# Allegro board 600-90523-01_CYW9BTWCDEVAL1_REV2.0.brd
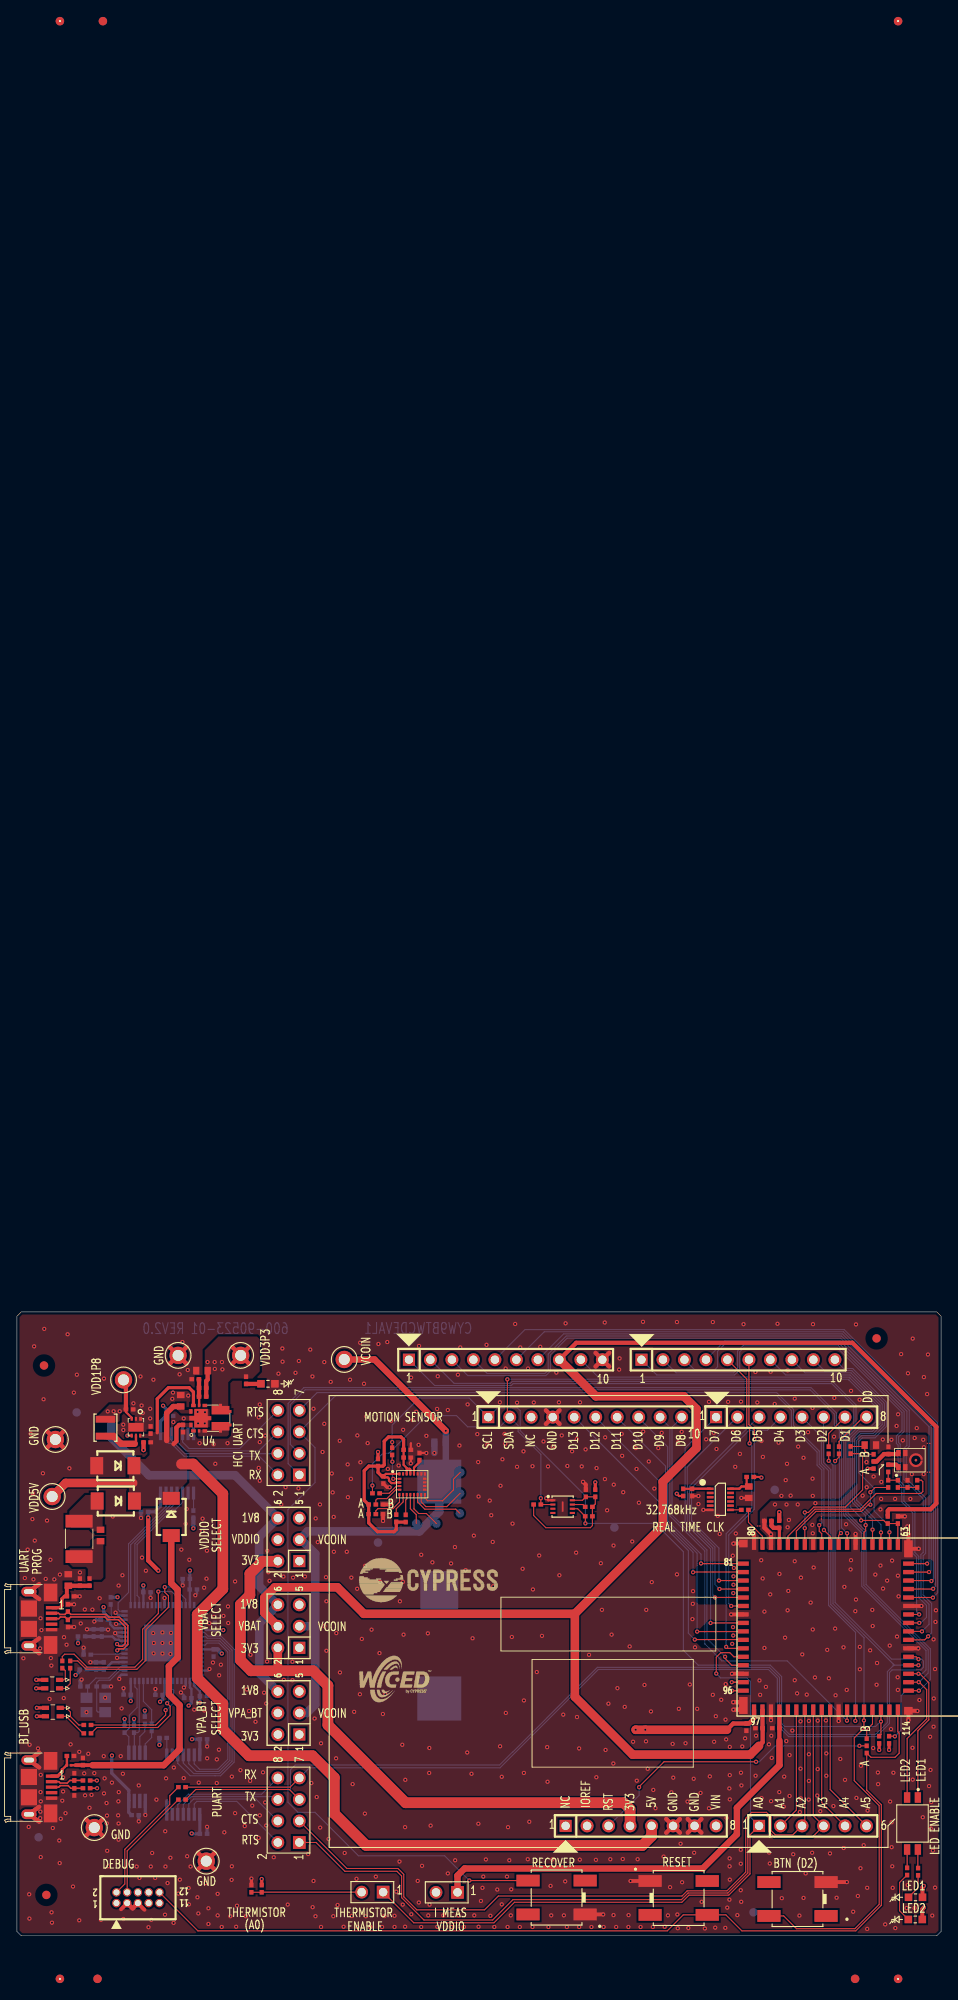
[diagram p0: board, top side]
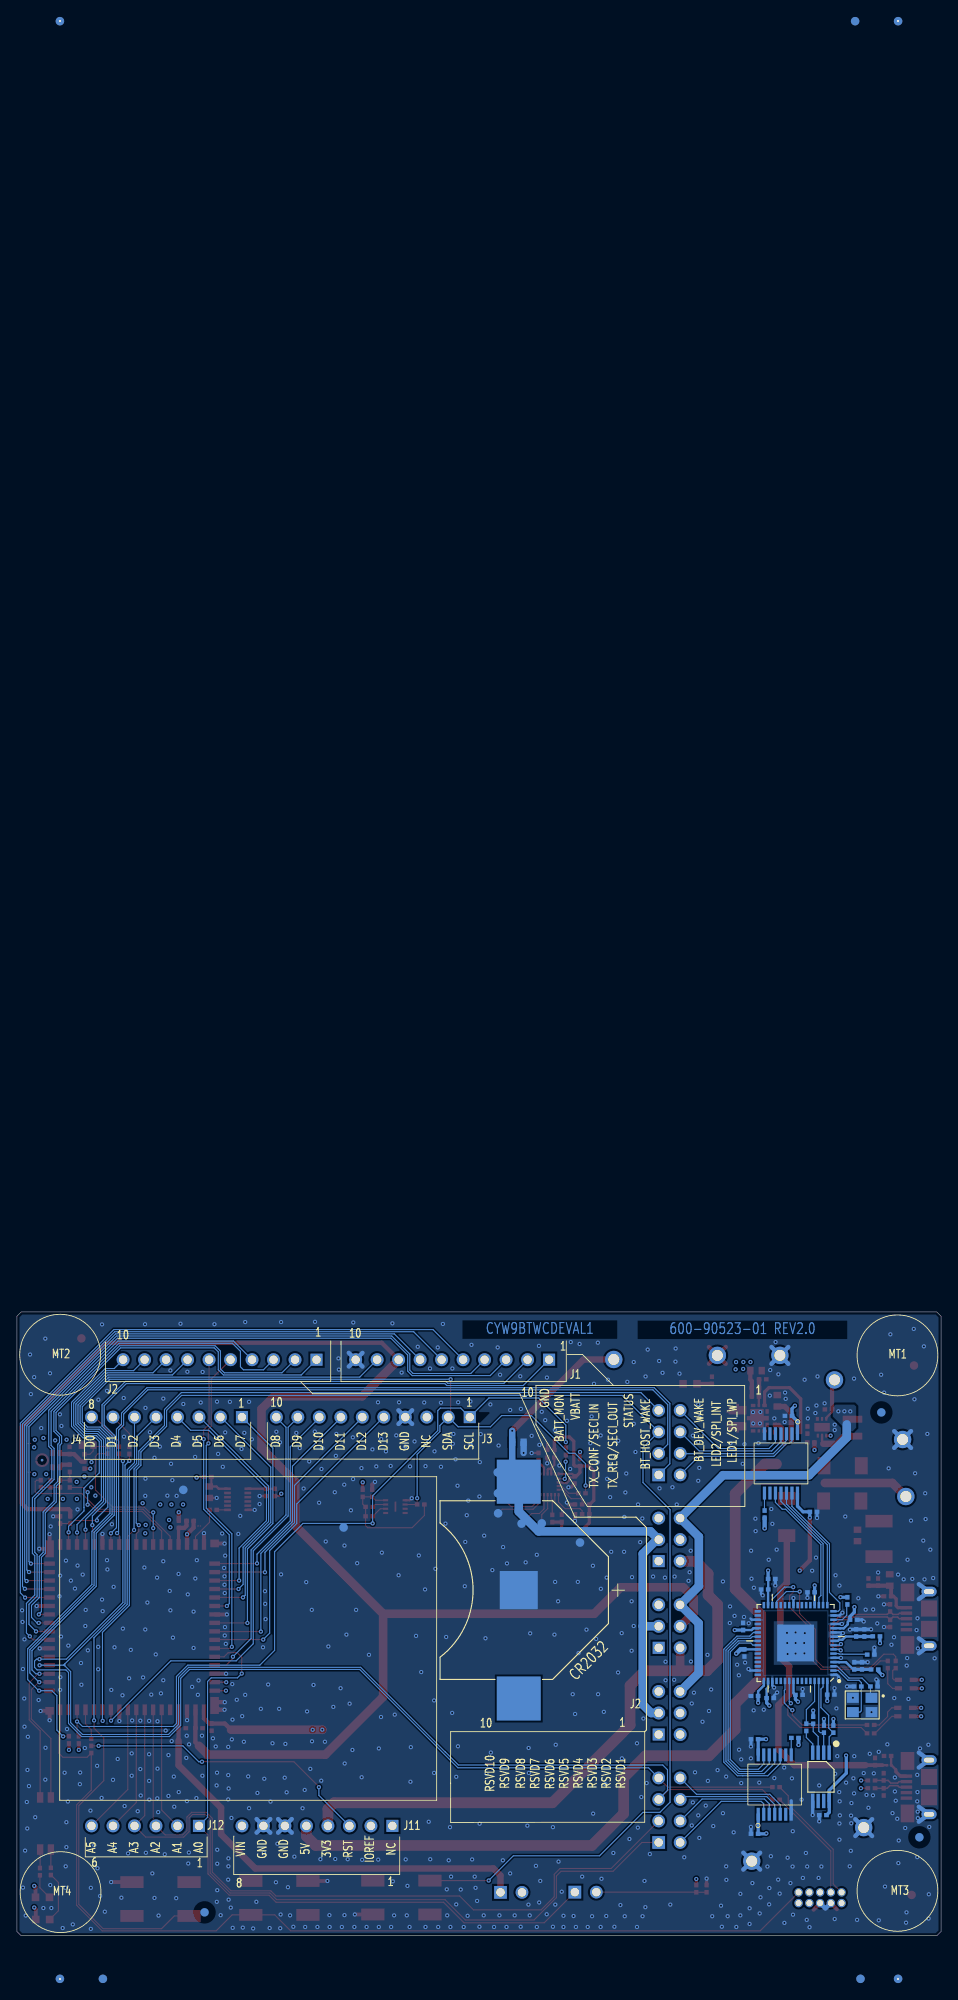
[diagram p1: board, bottom side, seen from below]

Outline 109.22 x 73.66 mm; copper layers: TOP, L02_GND, L03_PWR, BOTTOM. Coordinates in mm from the lower left corner of the outline.
Outline path: 0,73.15 0,0.51 0.51,0 108.71,0 109.22,0.51 109.22,73.15 108.71,73.66 0.51,73.66 0,73.15

## Design rules (mm)
net group DIFFPAIR0: nets N16980600 N16980623
net group DIFFPAIR1: nets BT_USB_DM BT_USB_DP
net group PWR: nets 1V8_FTDI VDDIO
net group USB: nets USB_DM USB_DP

## Placement (name value [footprint] x y rotation side)
C1  0.1uF  [CAPC1005_IS0402Q]  89.69 24.51 180 top
C2  0.1uF  [CAPC1005_IS0402Q]  88.75 49 180 top
C3  0.1uF  [CAPC1005_IS0402Q]  87.71 24.51 180 top
C4  10uF  [CAPC1608_IS0603Q]  86.49 52.37 270 top
C5  4.7uF  [CAPC1608_IS0603Q]  100.86 57.94 0 top
C6  0.1uF  [CAPC1005_IS0402Q]  103 57.3 90 top
C7  0.1uF  [CAPC1005_IS0402Q]  102.97 55.19 90 top
C8  0.1uF  [CAPC1005_IS0402Q]  43.31 53.82 90 top
C9  10uF  [CAPC1005_IS0402Q]  46.13 57.38 0 top
C10  0.1uF  [CAPC1005_IS0402Q]  46.13 56.46 0 top
C11  0.1uF  [CAPC1005_IS0402Q]  67.23 52.25 90 top
C12  0.01uF  [CAPC1005_IS0402Q]  47.57 56.59 270 top
C13  4.7uF  [CAPC1608_IS0603Q]  50.01 58.27 180 bottom
C15  0.33uF  [CAPC1005_IS0402Q]  21.95 63.65 180 top
C16  10uF  [CAPC1608_IS0603Q]  21.87 66.73 180 top
C17  10uF  [CAPC1608_IS0603Q]  19.35 63.17 90 top
C18  1uF  [CAPC1005_IS0402Q]  19.63 59.89 270 top
C19  10uF  [CAPC1005_IS0402Q]  15.8 59.72 90 top
C20  10uF  [CAPC1005_IS0402Q]  13.31 62.15 0 top
C21  0.1uF  [CAPC1005_IS0402Q]  23.39 36.53 270 bottom
C22  0.1uF  [CAPC1005_IS0402Q]  10.34 37.31 0 bottom
C23  0.1uF  [CAPC1005_IS0402Q]  13.03 28.47 0 bottom
C24  0.1uF  [CAPC1005_IS0402Q]  18.03 61.39 180 bottom
C25  0.1uF  [CAPC1005_IS0402Q]  15.09 50.06 0 bottom
C28  0.1uF  [CAPC1005_IS0402Q]  79.81 52.35 270 top
C29  0.1uF  [CAPC1005_IS0402Q]  16.79 28.45 0 bottom
C30  0.1uF  [CAPC1005_IS0402Q]  15.37 40.56 180 bottom
C31  0.1uF  [CAPC1005_IS0402Q]  20.85 40.89 180 bottom
C32  0.1uF  [CAPC1005_IS0402Q]  23.24 33.4 90 bottom
C33  4.7uF  [CAPC1005_IS0402Q]  20.02 42.14 180 bottom
C34  0.1uF  [CAPC1005_IS0402Q]  10.26 31.88 270 bottom
C35  4.7uF  [CAPC1005_IS0402Q]  9.35 31.88 90 bottom
C36  0.1uF  [CAPC1005_IS0402Q]  10.03 35.76 270 bottom
C37  4.7uF  [CAPC1005_IS0402Q]  9.07 35.76 90 bottom
C38  0.1uF  [CAPC1005_IS0402Q]  6.32 40.08 180 top
C39  4.7uF  [CAPC1608_IS0603Q]  6.07 42.01 90 top
C40  3.3uF  [CAPC1005_IS0402Q]  22.05 28.32 0 bottom
C41  0.1uF  [CAPC1005_IS0402Q]  20.19 28.07 0 bottom
C42  0.1uF  [CAPC1005_IS0402Q]  22.05 12.04 180 bottom
C43  0.1uF  [CAPC1005_IS0402Q]  22.05 23.22 180 bottom
C44  9pF  [CAPC1005_IS0402Q]  7.92 29.44 180 bottom
C45  9pF  [CAPC1005_IS0402Q]  9.86 29.44 0 bottom
C46  0.1uF  [CAPC1005_IS0402Q]  13.97 14.25 180 bottom
C47  2.2uF (DNI)  [CAPC1005_IS0402Q]  7.8 20.57 90 top
C48  0.1uF  [CAPC1005_IS0402Q]  86.21 24.64 270 top
D1  APT1608SGD3  [LEDC1608Q]  106.2 4.55 90 top
D2  LTST-C190CKT  [LEDC1608Q]  106.17 1.93 90 top
D3  PMEG3020BEP  [SOD-128]  11.68 51.33 180 top
D5  PMEG3020BEP  [SOD-128]  11.63 55.5 180 top
D6  APT1608SGD3  [LEDC1608Q]  29.67 65.18 270 top
D7  APTB1615SURKCGKC-F01  [LEDS4_KING_APTB1615Q]  4.17 29.72 180 top
D8  10V  [FUSC1005_IS0402Q]  6.02 36.88 90 top
D9  10V  [FUSC1005_IS0402Q]  6.02 38.71 270 top
D10  10V  [FUSC1005_IS0402Q]  7.44 41.76 270 top
D11  APTB1615SURKCGKC-F01  [LEDS4_KING_APTB1615Q]  4.24 26.42 180 top
D12  10V (DNI)  [FUSC1005_IS0402Q]  6.32 21.23 180 top
D13  10V (DNI)  [FUSC1005_IS0402Q]  6.78 18.77 270 top
D14  10V (DNI)  [FUSC1005_IS0402Q]  6.78 16.99 90 top
D15  PMEG3020BEP (DNI)  [SOD-128]  18.24 49.45 270 top
FB1  600Ohms  [INDC1005_IS0402Q]  7.85 31.45 0 bottom
FB2  600Ohms  [INDC1005_IS0402Q]  7.65 35.36 0 bottom
FB3  600Ohms  [INDC1005_IS0402Q]  8.59 41.76 270 top
FB4  120 Ohms (DNI)  [INDC0603_IS0201Q]  6.15 20.14 180 top
G1  32.768KHz  [SOJ50P290_12_D360_LCQ]  83.13 51.54 0 top
J1  S-M-.100-1X10  [HDR10X1]  46.33 68.02 0 top
J2  S-M-.100-1X10  [HDR10X1]  73.81 68.02 0 top
J3  NPPC101LFBN-RC  [HDR10X1]  55.7 61.24 0 top
J4  NPPC081LFBN-RC  [HDR8X1]  82.63 61.24 0 top
J5  S-M-.100-2X4  [CTST254PDS8]  33.38 54.42 90 top
J6  MICRO-USB-B  [MUP_MUP-U521]  1.42 37.44 270 top
J7  S-M-.100-2X3  [HDR3X2]  33.38 44.24 90 top
J8  S-M-.100-2X3  [HDR3X2]  33.38 34 90 top
J9  2013499-1 (DNI)  [MUP_MUP-U521]  1.42 17.55 270 top
J10  S-M-.100-2X4  [CTST254PDS8]  33.38 11.02 90 top
J11  NPPC081LFBN-RC  [HDR8X1]  64.85 12.98 0 top
J12  NPPC061LFBN-RC  [HDR6X1]  87.71 12.98 0 top
J13  3220-10-0100-00  [HDR5X2_50MIL]  11.76 3.86 180 top
J14  PBC02SAAN  [CTST254PSS2]  43.28 5.16 180 top
J15  PBC02SAAN  [CTST254PSS2]  52.07 5.13 180 top
J16  S-M-.100-2X3  [HDR3X2]  33.38 23.77 90 top
L4  1uH  [INDC2520]  10.46 59.99 90 top
MIC1  ICS-40180 (DNI)  [MICS5_INVEN_ICS-40180]  106.25 56.16 90 top
NOREF  -  [unnamed]  3.2 67.34 0 top
NOREF#2  -  [unnamed]  3.48 4.83 0 top
NOREF#3  -  [#2]  -0.03 0 90 top
NOREF#4  -  [unnamed#2]  5.08 -5.08 0 top
NOREF#5  -  [#2]  419.1 -111.76 0 top
NOREF#6  -  [unnamed#2]  5.08 226.06 0 top
NOREF#7  -  [unnamed]  10.16 226.06 0 top
NOREF#8  -  [unnamed]  99.06 -5.08 0 top
NOREF#9  -  [#2]  109.32 -10.16 90 top
NOREF#10  -  [#2]  22.86 -20.32 0 top
NOREF#11  -  [#2]  139.7 76.2 0 top
NOREF#12  -  [unnamed#2]  104.14 226.06 0 top
NOREF#13  -  [unnamed]  9.53 -5.08 0 top
NOREF#14  -  [#2]  0 -10.16 0 top
NOREF#15  -  [#2]  0 -0.03 0 top
NOREF#16  -  [#2]  -185.42 248.29 0 top
NOREF#17  -  [unnamed#2]  104.14 -5.08 0 top
NOREF#18  -  [#2]  -279.4 -190.5 0 top
NOREF#19  -  [unnamed]  101.6 70.54 0 top
NOREF#20  -  [#2]  157.48 114.3 0 top
NOREF#21  -  [#2]  0 -10.16 90 top
NOREF#22  -  [#2]  419.1 -111.76 180 bottom
NOREF#23  -  [unnamed]  87.05 2.77 180 bottom
NOREF#24  -  [unnamed]  99.06 -5.08 180 bottom
NOREF#25  -  [#2]  104.06 5.16 180 bottom
NOREF#26  -  [unnamed]  9.53 -5.08 180 bottom
NOREF#27  -  [unnamed]  7.06 61.8 180 bottom
NOREF#28  -  [#2]  5.16 68.53 180 bottom
NOREF#29  -  [#2]  104.11 68.61 180 bottom
NOREF#30  -  [#2]  5.16 5.31 180 bottom
NOREF#31  -  [unnamed]  2.57 11.63 180 bottom
NOREF#32  -  [unnamed]  10.16 226.06 180 bottom
R1  100K (DNI)  [RESC1005_IS0402Q]  102.92 49.1 90 top
R2  150K (DNI)  [RESC1005_IS0402Q]  104.11 49.1 90 top
R4  0  [RESC1005_IS0402Q]  19.51 17.55 180 top
R5  0  [RESC1005_IS0402Q]  19.51 16.08 180 top
R6  0  [RESC1005_IS0402Q]  90.09 48.59 270 top
R10  100  [RESC1005_IS0402Q]  98.53 57.35 90 top
R11  0  [RESC1005_IS0402Q_OPT_AB]  101.24 56.01 90 top
R12  0  [RESC1005_IS0402Q]  86.03 50.29 0 top
R13  0  [RESC1005_IS0402Q]  102.97 53.37 90 top
R14  100K (DNI)  [RESC1005_IS0402Q]  104.11 53.37 270 top
R15  0  [RESC1005_IS0402Q]  106.4 53.37 270 top
R16  200  [RESC1005_IS0402Q]  106.5 7.57 90 top
R17  0  [RESC1005_IS0402Q]  105.26 53.37 90 top
R18  200  [RESC1005_IS0402Q]  105.21 7.59 90 top
R19  0  [RESC1005_IS0402Q]  42.67 55.88 270 top
R20  0  [RESC1005_IS0402Q]  68.35 52.25 270 top
R21  4.7K  [RESC1005_IS0402Q]  67.59 49.53 180 top
R22  10K  [RESC1005_IS0402Q]  44.83 49.3 90 top
R23  10K  [RESC1005_IS0402Q_OPT_AB]  42.42 49.78 0 top
R24  10K  [RESC1005_IS0402Q_OPT_AB]  42.42 50.93 0 top
R25  4.7K  [RESC1005_IS0402Q]  61.49 50.93 0 top
R26  10K  [RESC1005_IS0402Q]  45.95 49.28 90 top
R27  100K  [RESC1005_IS0402Q]  67.59 50.65 0 top
R28  0  [RESC1005_IS0402Q]  44.35 57.2 90 top
R29  0  [RESC1005_IS0402Q]  42.44 52.25 180 top
R30  100K @ 25C  [RESC1005_IS0402Q]  28.93 5.56 90 top
R32  100K  [RESC1005_IS0402Q]  27.71 5.56 270 top
R33  0 (DNI)  [RESC1608_IS0603Q]  9.88 47.27 90 top
R34  470K  [RESC1005_IS0402Q]  21.95 64.69 180 top
R35  330  [RESC1005_IS0402Q]  27.08 65.58 90 top
R37  150K  [RESC1005_IS0402Q]  21.08 65.71 180 top
R41  10K  [RESC1005_IS0402Q]  20.85 49.78 90 bottom
R42  200  [RESC1005_IS0402Q]  5.36 32.03 90 top
R43  200  [RESC1005_IS0402Q]  6.3 32.03 90 top
R44  12K  [RESC1005_IS0402Q]  8.31 33.2 180 bottom
R45  1K  [RESC1005_IS0402Q]  11.07 39.55 90 bottom
R46  200  [RESC1005_IS0402Q]  8.33 24.89 0 top
R47  200  [RESC1005_IS0402Q]  8.33 23.9 0 top
R48  10K  [RESC1005_IS0402Q]  17.27 23.37 0 bottom
R49  10K  [RESC1005_IS0402Q]  12.73 24.41 90 bottom
R50  10K  [RESC1005_IS0402Q]  13.84 24.41 90 bottom
R51  10K  [RESC1005_IS0402Q]  15.11 25.45 90 bottom
R52  2.2K  [RESC1005_IS0402Q]  15.93 24.61 90 bottom
R53  4.7K  [RESC1005_IS0402Q]  103.07 23.14 90 top
R54  4.7K  [RESC1005_IS0402Q]  101.9 23.14 90 top
R72  0  [RESC1005_IS0402Q_OPT_AB]  100.43 22.43 90 top
R97  10K  [RESC1005_IS0402Q]  15.39 58.27 180 top
R98  0 (DNI)  [RESC1005_IS0402Q]  8.23 18.34 180 top
R99  0 (DNI)  [RESC1005_IS0402Q]  8.23 17.42 180 top
R100  0  [RESC1005_IS0402Q]  86.66 54.18 0 top
R101  0  [RESC1005_IS0402Q]  78.74 52.35 270 top
R102  0  [RESC1005_IS0402Q]  95.94 57.33 90 top
R103  0  [RESC1005_IS0402Q]  97.16 57.33 90 top
SW1  B3SN-3012  [SWPBS4_OMRON_B3SN-3012Q]  63.78 4.52 0 top
SW2  B3SN-3012  [SWPBS4_OMRON_B3SN-3012Q]  78.21 4.47 180 top
SW3  B3SN-3012  [SWPBS4_OMRON_B3SN-3012Q]  92.25 4.34 0 top
SW4  97C02SRT  [SWDPS4_GRAY_97C02]  105.84 13.26 270 top
TH1  MF-MSMF050-2  [FUSE_MFMSMF050]  7.34 46.86 90 top
TIE1  5X13MIL  [NET_TIE_5X13MILS]  95.07 49.35 90 top
TIE2  5X13MIL  [NET_TIE_5X13MILS]  107.75 54.74 180 top
TIE3  5X13MIL  [NET_TIE_5X13MILS]  107.75 58.14 180 top
TIE4  5X13MIL  [NET_TIE_5X13MILS]  87.68 48.39 0 top
TP1  TP-SMT-030-RND  [TP40B]  52.35 49.89 180 bottom
TP2  TP-SMT-030-RND  [TP40B]  52.37 52.25 180 bottom
TP3  TP-SMT-030-RND  [TP40B]  47.19 48.69 180 bottom
TP4  TP-SMT-030-RND  [TP40B]  49.58 48.67 180 bottom
TP5  TP-SMT-030-RND  [TP40B]  52.4 54.71 180 bottom
TP6  BLACK  [TPT1_KOB_151-10X-RC]  22.38 8.81 0 top
TP7  BLACK  [TPT1_KOB_151-10X-RC]  4.55 58.6 0 top
TP8  BLACK  [TPT1_KOB_151-10X-RC]  19.05 68.53 0 top
TP9  200-MM-RND  [TP40B]  70.61 48.21 180 bottom
TP10  200-MM-RND  [TP40B]  89.56 52.65 180 bottom
TP11  200-MM-RND  [TP40B]  42.67 46.43 180 bottom
TP12  RED  [TPT1_KOB_151-10X-RC]  26.44 68.53 0 top
TP13  RED  [TPT1_KOB_151-10X-RC]  12.6 65.63 0 top
TP14  RED  [TPT1_KOB_151-10X-RC]  4.17 51.87 0 top
TP17  RED  [TPT1_KOB_151-10X-RC]  38.68 68.05 0 top
TP18  BLACK  [TPT1_KOB_151-10X-RC]  9.14 12.78 0 top
U1  BT Carrier Module  [QFN_36X18_5_64_BASE]  104.11 46.2 270 top
U2  LSM9DS1  [LGA43P350X300_24_ST-LGA24N]  46.71 53.31 0 top
U3  DFN8 (DNI)  [SON50P250X250_8_HS120X020_PRELIM]  64.49 50.67 0 top
U4  XCL212B082DR  [XCL211_1]  22.86 61.11 270 top
U5  XC9261B18DER-G  [USP-6C_XC9258]  13.82 60.05 270 top
U7  MAX3378EEUD+  [SSOP14]  18.92 55.78 270 bottom
U8  FT2232HQ-TRAY  [QFN50P900X900_64_HS435N]  17.2 34.57 0 bottom
U9  MAX3378EEUD+  [SSOP14]  19.66 17.86 90 bottom
U10  AT93C46D-TH-T  [TSOP65P640_8_D300N]  14.2 18.77 270 bottom
Y1  12.000MHz  [XTALS4_3M2X2M5]  9.32 27.25 270 bottom
ZB1  3002TR  [BATHS3_KEY_3002Q]  49.91 40.82 90 bottom

## Library data of the parts
C1-C13 C15-C25 C28-C48 = CAP: User Part Number: Part No
D1 D2 D6 = DIO-LED: User Part Number: Part No
D3 D5 D15 = DIO-SCHOTTKY
D7 = LED-DUAL-RED1-GRN2_1: User Part Number: Part No
D8-D10 D12-D14 = DIO-TVS-BIPOLAR-2: User Part Number: Part No
D11 = LED-DUAL-RED1-GRN2: User Part Number: Part No
FB1-FB4 = FB: User Part Number: Part No
G1 = OSC-SG-3030LC: User Part Number: Part No
J1 J2 = HDR1X10-J
J3 = SKT-10-J
J4 J11 = SKT-8-ALT-J
J5 J10 = HDR2X4R-J: User Part Number: Part No
J6 J9 = USB-5P-6SH-J: User Part Number: Part No
J7 J8 J13 J16 = HDR2X4R-J_0
J12 = SKT-6-J
J14 J15 = HDR1X2-J: User Part Number: Part No
L4 = IND
MIC1 = MICROPHONE-O1P5G234: User Part Number: Part No
NOREF#4 NOREF#6 NOREF#12 NOREF#17 = -: User Part Number: MTGHOLE_D320N
R1 R2 R4-R6 R10 R12-R22 R25-R30 R32-R35 R37 R41-R54 R97-R103 = RES: User Part Number: Part No
R11 R72 = RES-OPT-A-B: User Part Number: Part No
R23 R24 = RES-OPT-B-A: User Part Number: Part No
SW1-SW3 = SW-SPST-12-34: User Part Number: Part No
SW4 = SW-DIP-2: User Part Number: Part No
TH1 = FUSE-RESETTABLE-12
TIE1-TIE4 = NET-TIE3: User Part Number: Part No
TP1-TP5 TP9-TP11 = TP
TP6-TP8 TP12-TP14 TP17 TP18 = TP: User Part Number: Part No
U1 = BT Carrier Module_2
U2 = LSM9DS1-LGA24: User Part Number: Part No
U3 = LTC4313-DIL8_0: User Part Number: Part No
U4 = XC9236-ADJ-DFN6H_0: Tolerance: ?; User Part Number: *********
U5 = XC9265-DFN6H_4
U7 U9 = MAX3378-TSSOP14: User Part Number: ***; Tolerance: ***
U8 = USB-FT2232H-QFN64H: User Part Number: Part No
U10 = AT93C46A-10PU-ALT: User Part Number: PART NUMBER; Tolerance: TOLERANCE
Y1 = XTAL-1G3G: User Part Number: Part No
ZB1 = BATTERY-HOLDER-P2N1: User Part Number: Part No

## Footprints (pads in the part's own frame, mm; a bottom-side part is the same pattern mirrored in y, then rotated)
BATHS3_KEY_3002Q
  rect 4.5x4.5 smd: N(0,0)
  rect 5.2x5.2 smd: P1(-12.8,0) P2(12.8,0)
CAPC1005_IS0402Q
  rect 0.55x0.5 smd: 1(-0.425,0) 2(0.425,0)
CAPC1608_IS0603Q
  rect 0.75x0.9 smd: 1(-0.675,0) 2(0.675,0)
CTST254PDS8
  rect 1.5x1.5 hole 1: 1(0,0)
  round 1.5 hole 1: 2(0,2.54) 3(2.54,0) 4(2.54,2.54) 5(5.08,0) 6(5.08,2.54) 7(7.62,0) 8(7.62,2.54)
CTST254PSS2
  rect 1.5x1.5 hole 1: 1(0,0)
  round 1.5 hole 1: 2(2.54,0)
FUSC1005_IS0402Q
  rect 0.55x0.5 smd: 1(-0.425,0) 2(0.425,0)
FUSE_MFMSMF050
  rect 1.499x3.2 smd: 1(-2.095,0) 2(2.095,0)
HDR3X2
  rect 1.422x1.422 hole 0.991: 1(0,0)
  round 1.524 hole 0.991: 2(0,2.54) 3(2.54,0) 4(2.54,2.54) 5(5.08,0) 6(5.08,2.54)
HDR5X2_50MIL
  round 0.991 hole 0.711: 1(0,0) 2(0,-1.27) 3(-1.27,0) 4(-1.27,-1.27) 5(-2.54,0) 6(-2.54,-1.27) 7(-3.81,0) 8(-3.81,-1.27) 9(-5.08,0) 10(-5.08,-1.27)
HDR6X1
  rect 1.422x1.422 hole 0.991: 1(0,0)
  round 1.524 hole 0.991: 2(2.54,0) 3(5.08,0) 4(7.62,0) 5(10.16,0) 6(12.7,0)
HDR8X1
  rect 1.422x1.422 hole 0.991: 1(0,0)
  round 1.524 hole 0.991: 2(2.54,0) 3(5.08,0) 4(7.62,0) 5(10.16,0) 6(12.7,0) 7(15.24,0) 8(17.78,0)
HDR10X1
  rect 1.422x1.422 hole 0.991: 1(0,0)
  round 1.524 hole 0.991: 2(2.54,0) 3(5.08,0) 4(7.62,0) 5(10.16,0) 6(12.7,0) 7(15.24,0) 8(17.78,0) 9(20.32,0) 10(22.86,0)
INDC0603_IS0201Q
  rect 0.3x0.3 smd: 1(-0.24,0) 2(0.24,0)
INDC1005_IS0402Q
  rect 0.55x0.5 smd: 1(-0.425,0) 2(0.425,0)
INDC2520
  rect 0.813x2.311 smd: 1(-1,0) 2(1,0)
LEDC1608Q
  rect 0.9x0.9 smd: A(0,-0.826) C(0,0.826)
LEDS4_KING_APTB1615Q
  rect 0.85x0.5 smd: A1(0.875,0.5) A2(0.875,-0.5) C1(-0.875,0.5) C2(-0.875,-0.5)
LGA43P350X300_24_ST-LGA24N
  rect 0.25x0.4 smd: 1(-1.505,1.225) 6(-1.505,-1.225) 7(-1.075,-1.225) 8(-0.645,-1.225) 9(-0.215,-1.225) 10(0.215,-1.225) 11(0.645,-1.225) 12(1.075,-1.225) 13(1.505,-1.225) 18(1.505,1.225) 19(1.075,1.225) 20(0.645,1.225) 21(0.215,1.225) 22(-0.215,1.225) 23(-0.645,1.225) 24(-1.075,1.225)
  rect 0.4x0.25 smd: 2(-1.475,0.645) 3(-1.475,0.215) 4(-1.475,-0.215) 5(-1.475,-0.645) 14(1.475,-0.645) 15(1.475,-0.215) 16(1.475,0.215) 17(1.475,0.645)
MICS5_INVEN_ICS-40180
  custom 0.3x0.075 hole 0.5 unplated: (0,0)
  rect 0.725x0.525 smd: 1(-0.837,2.074) 2(-0.837,1.252) 4(0.837,1.252) 5(0.837,2.074)
  round 0.2 smd: 3(0,0.688)
MUP_MUP-U521
  rect 0.4x1.35 smd: 1(-1.3,2.675) 2(-0.65,2.675) 3(0,2.675) 4(0.65,2.675) 5(1.3,2.675)
  rect 2.1x1.6 smd: SH1(-3.1,2.55) SH2(3.1,2.55)
  oval 1.15x1.8 hole 0.55x1.2: SH3(-3.2,0) SH4(3.2,0)
  rect 1.9x1.9 smd: SH5(-1.2,0) SH6(1.2,0)
NET_TIE_5X13MILS
  rect 0.1x0.13 smd: 1(-0.115,0) 2(0.115,0)
QFN50P900X900_64_HS435N
  rect 0.75x0.3 smd: 1(-4.475,3.75) 2(-4.475,3.25) 3(-4.475,2.75) 4(-4.475,2.25) 5(-4.475,1.75) 6(-4.475,1.25) 7(-4.475,0.75) 8(-4.475,0.25) 9(-4.475,-0.25) 10(-4.475,-0.75) 11(-4.475,-1.25) 12(-4.475,-1.75) 13(-4.475,-2.25) 14(-4.475,-2.75) 15(-4.475,-3.25) 16(-4.475,-3.75) 33(4.475,-3.75) 34(4.475,-3.25) 35(4.475,-2.75) 36(4.475,-2.25) 37(4.475,-1.75) 38(4.475,-1.25) 39(4.475,-0.75) 40(4.475,-0.25) 41(4.475,0.25) 42(4.475,0.75) 43(4.475,1.25) 44(4.475,1.75) 45(4.475,2.25) 46(4.475,2.75) 47(4.475,3.25) 48(4.475,3.75)
  rect 0.3x0.75 smd: 17(-3.75,-4.475) 18(-3.25,-4.475) 19(-2.75,-4.475) 20(-2.25,-4.475) 21(-1.75,-4.475) 22(-1.25,-4.475) 23(-0.75,-4.475) 24(-0.25,-4.475) 25(0.25,-4.475) 26(0.75,-4.475) 27(1.25,-4.475) 28(1.75,-4.475) 29(2.25,-4.475) 30(2.75,-4.475) 31(3.25,-4.475) 32(3.75,-4.475) 49(3.75,4.475) 50(3.25,4.475) 51(2.75,4.475) 52(2.25,4.475) 53(1.75,4.475) 54(1.25,4.475) 55(0.75,4.475) 56(0.25,4.475) 57(-0.25,4.475) 58(-0.75,4.475) 59(-1.25,4.475) 60(-1.75,4.475) 61(-2.25,4.475) 62(-2.75,4.475) 63(-3.25,4.475) 64(-3.75,4.475)
  rect 4.35x4.35 smd: H(0,0)
QFN_36X18_5_64_BASE
  rect 1.27x0.508 smd: 63(0,0) 64(0,-1) 65(0,-2) 66(0,-3) 67(0,-4) 68(0,-5) 69(0,-6) 70(0,-7) 71(0,-8) 72(0,-9) 73(0,-10) 74(0,-11) 75(0,-12) 76(0,-13) 77(0,-14) 78(0,-15) 79(0,-16) 80(0,-17) 97(19.516,-17) 98(19.516,-16) 99(19.516,-15) 100(19.516,-14) 101(19.516,-13) 102(19.516,-12) 103(19.516,-11) 104(19.516,-10) 105(19.516,-9) 106(19.516,-8) 107(19.516,-7) 108(19.516,-6) 109(19.516,-5) 110(19.516,-4) 111(19.516,-3) 112(19.516,-2) 113(19.516,-1) 114(19.516,0)
  rect 0.508x1.27 smd: 81(2.26,-18.261) 82(3.26,-18.261) 83(4.26,-18.261) 84(5.26,-18.261) 85(6.26,-18.261) 86(7.26,-18.261) 87(8.26,-18.261) 88(9.26,-18.261) 89(10.26,-18.261) 90(11.26,-18.261) 91(12.26,-18.261) 92(13.26,-18.261) 93(14.26,-18.261) 94(15.26,-18.261) 95(16.26,-18.261) 96(17.26,-18.261) 115(17.26,1.255) 116(16.26,1.255) 117(15.26,1.255) 118(14.26,1.255) 119(13.26,1.255) 120(12.26,1.255) 121(11.26,1.255) 122(10.26,1.255) 123(9.26,1.255) 124(8.26,1.255) 125(7.26,1.255) 126(6.26,1.255) 127(5.26,1.255) 128(4.26,1.255) 129(3.26,1.255) 130(2.26,1.255)
  rect 2.007x1.016 smd: HS5(0.509,1.245) HS7(19.009,-18.26)
  rect 0.914x1.016 smd: HS6(-0.123,-18.26) HS8(19.639,1.24)
RESC1005_IS0402Q
  rect 0.55x0.5 smd: 1(-0.425,0) 2(0.425,0)
RESC1005_IS0402Q_OPT_AB
  rect 0.55x0.5 smd: A(-0.85,0) B(0.85,0) C(0,0)
RESC1608_IS0603Q
  rect 0.75x0.9 smd: 1(-0.675,0) 2(0.675,0)
SOD-128
  rect 1.524x2.032 smd: A(2.202,0) C(-2.202,0)
SOJ50P290_12_D360_LCQ
  rect 0.8x0.3 smd: 1(-1.2,1.25) 2(-1.2,0.75) 3(-1.2,0.25) 4(-1.2,-0.25) 5(-1.2,-0.75) 6(-1.2,-1.25) 7(1.2,-1.25) 8(1.2,-0.75) 9(1.2,-0.25) 10(1.2,0.25) 11(1.2,0.75) 12(1.2,1.25)
SON50P250X250_8_HS120X020_PRELIM
  rect 0.6x0.25 smd: 1(-1.148,0.75) 2(-1.148,0.25) 3(-1.148,-0.25) 4(-1.148,-0.75) 5(1.148,-0.75) 6(1.148,-0.25) 7(1.148,0.25) 8(1.148,0.75)
  rect 0.2x1.2 smd: H(0,0)
SSOP14
  rect 1.524x0.381 smd: 1(-3.505,1.951) 2(-3.505,1.3) 3(-3.505,0.65) 4(-3.505,0) 5(-3.505,-0.65) 6(-3.505,-1.3) 7(-3.505,-1.951) 8(3.505,-1.951) 9(3.505,-1.3) 10(3.505,-0.65) 11(3.505,0) 12(3.505,0.65) 13(3.505,1.3) 14(3.505,1.951)
SWDPS4_GRAY_97C02
  rect 1.25x0.75 smd: 1(-3.075,0.635) 2(-3.075,-0.635) 3(3.075,-0.635) 4(3.075,0.635)
SWPBS4_OMRON_B3SN-3012Q
  rect 2.75x1.4 smd: 1(3.375,-2) 2(-3.375,-2) 3(3.375,2) 4(-3.375,2)
TP40B
  round 1.016 smd: 1(0,0)
TPT1_KOB_151-10X-RC
  round 2.05 hole 1.3: 1(0,0)
TSOP65P640_8_D300N
  rect 1.7x0.4 smd: 1(-2.85,0.975) 2(-2.85,0.325) 3(-2.85,-0.325) 4(-2.85,-0.975) 5(2.85,-0.975) 6(2.85,-0.325) 7(2.85,0.325) 8(2.85,0.975)
unnamed
  round 1 smd: (0,0)
unnamed#2
  custom 1x0.25 hole 3.2 unplated: (0,0)
USP-6C_XC9258
  rect 0.457x0.356 smd: 1(-0.991,0.801)
  rect 0.457x0.254 smd: 2(-0.991,0.25) 3(-0.991,-0.25) 4(0.991,-0.25) 5(0.991,0.25) 6(0.991,0.751)
  rect 1.016x1.829 smd: H(0,0.248)
XCL211_1
  rect 0.4x0.55 smd: 1(1.5,-2) 3(1.5,-0.65) 4(-1.5,-0.65) 6(-1.5,-2)
  rect 0.4x0.3 smd: 2(1.5,-1.325) 5(-1.5,-1.325)
  rect 0.55x0.4 smd: 7(-0.8,-2.3) 9(0.8,-2.3)
  custom 2.2x2.6 smd: 8(0,-1.2)
  custom 1.25x2.35 smd: 10(1.075,1.325) 11(-1.075,1.325)
XTALS4_3M2X2M5
  rect 1.2x1.4 smd: 1(-0.85,1.1) 2(-0.85,-1.1) 3(0.85,-1.1) 4(0.85,1.1)

## Nets
1V8_FTDI: C21.2 C22.2 C23.2 C40.1 U8.12(VCORE#12) U8.37(VCORE#37) U8.49(VREGOUT) U8.64(VCORE#64)
5V_USB: D3.A R33.2 TH1.2
GND: C1.2 C3.2 C4.2 C8.1 C9.2 C10.2 C11.2 C12.1 C13.2 C16.2 C17.2 C18.2 C19.2 C20.2 C21.1 C22.1 C23.1 C24.1 C25.1 C28.2 C29.1 C30.1 C31.1 C32.1 C33.2 C34.1 C35.2 C36.1 C37.2 C38.1 C39.2 C40.2 C41.1 C42.1 C43.1 C44.2 C45.2 C46.1 C47.2 C48.2 D5.A D6.C(CATHODE) D8.1 D9.1 D10.1 D12.1 D13.1 D14.1 G1.6(GND) J1.10 J3.4 J6.5(GND) J6.SH1(SHIELD#SH1) J6.SH2(SHIELD#SH2) J6.SH3(SHIELD#SH3) J6.SH4(SHIELD#SH4) J6.SH5(SHIELD#SH5) J6.SH6(SHIELD#SH6) J9.5(GND) J9.SH1(SHIELD#SH1) J9.SH2(SHIELD#SH2) J9.SH3(SHIELD#SH3) J9.SH4(SHIELD#SH4) J9.SH5(SHIELD#SH5) J9.SH6(SHIELD#SH6) J11.6 J11.7 J13.3(P3) J13.5(P5) R2.2 R23.B R24.B R32.1 R37.2 R44.2 SW1.1(A) SW2.1(A) SW3.3(C) TIE1.1(N1) TIE2.1(N1) TIE3.1(N1) TIE4.1(N1) TP6.1(TP) TP7.1(TP) TP8.1(TP) TP9.1(TP) TP10.1(TP) TP11.1(TP) TP18.1(TP) U1.68(GND_66) U1.80(GND_80) U1.87(GND_87) U1.94(GND_94) U1.99(GND_99) U1.107(GND_107) U1.120(GND_120) U1.125(GND_125) U1.HS5(GND_HS5) U1.HS6(GND_HS6) U1.HS7(GND_HS7) U1.HS8(GND_HS8) U2.14(RSVD1_GND) U2.15(RSVD2_GND) U2.16(RSVD3_GND) U2.17(RSVD4_GND) U2.18(RSVD5_GND) U2.19(GND1) U2.20(GND2) U3.1(GND_1) U3.H(GND_H) U4.8(GND) U5.1(PGND) U5.2(AGND) U5.H(HS_GND) U7.7(GND) U8.1(GND#1) U8.5(GND#5) U8.10(AGND) U8.11(GND#11) U8.13(TEST) U8.15(GND#15) U8.25(GND#25) U8.35(GND#35) U8.47(GND#47) U8.51(GND#51) U8.H(HS-GND) U9.7(GND) U10.5(GND) Y1.2(GND#2) Y1.4(GND#4) ZB1.N
GND_A: C2.2 C5.2 C6.2 MIC1.2(GND1) MIC1.3(GND2) MIC1.4(GND3) R17.2 TIE1.2(N2) TIE2.2(N2) TIE3.2(N2) TIE4.2(N2) U1.73(GND_73) U1.78(GND_78)
VBATT: C3.1 J1.8 J8.4(P4) R1.2 U1.98(VBATT)
VDD1P8: C20.1 J7.6(P6) J8.6(P6) J16.6(P6) L4.2 TP13.1(TP) U5.3(VOUT)
VDD3P3: C15.1 C16.1 C25.2 C29.2 C30.2 C31.2 C32.2 C33.1 C41.2 C43.2 C46.2 D7.A1(RED_ANODE) D7.A2(GREEN_ANODE) D11.A1(RED_ANODE) D11.A2(GREEN_ANODE) FB1.1 FB2.1 J7.2(P2) J8.2(P2) J11.4 J16.2(P2) R34.1 R35.2 R45.2 R49.2 R50.2 R51.2 R100.2 TP12.1(TP) U4.11(L2) U7.14(VCC) U8.20(VCCIO#20) U8.31(VCCIO#31) U8.42(VCCIO#42) U8.50(VREGIN) U8.56(VCCIO#56) U9.14(VCC) U10.8(VCC)
VDD5V: C17.1 C18.1 C19.1 D3.C D5.C D15.C J11.5 R97.1 TP14.1(TP) U4.6(CE) U4.7(AVIN) U4.9(PVIN) U5.6(VIN)
VDDIO: C24.2 C42.2 D1.A(ANODE) D2.A(ANODE) J7.4(P4) J11.2 J13.1(P1) J15.2 R6.1 R11.A R19.1 R20.1 R30.2 R41.1 R48.1 R53.1 R54.1 R101.2 U7.1(VL) U9.1(VL)
A0: J12.1 J14.1 U1.92(COL0/A0)
A1: J12.2 U1.102(COL1/A1)
A2_PUART_CTS_L: J10.3(P3) J12.3 U1.103(PUART_CTS_N/COL2/A2)
A3_PUART_RTS_L: J10.1(P1) J12.4 U1.104(PUART_RTS_N/COL3/A3)
A4: J12.5 U1.105(COL4/PCM_CLK/I2S_CLK/A4)
A5: J12.6 U1.106(COL5/PCM_SYNC/I2S_WS/A5)
ARD_RST: J11.3 R72.C
BATT_MON: J1.9 R1.1 R2.1 U1.63(BATT_MON)
BT_DEV_WAKE: J1.3 U1.130(BT_DEV_WAKE)
BT_HOST_WAKE: J1.4 U1.129(BT_HOST_WAKE)
BT_REG_ON: U1.101(BT_REG_ON)
BT_RST: J13.10(P10) R72.A SW2.4(D) U1.114(BT_RST)
BT_UART_CTS_L: J5.5(P5) SW1.4(D) U1.72(BT_UART_CTS_N)
BT_UART_RTS_L: J5.7(P7) U1.71(BT_UART_RTS_N)
BT_UART_RX: J5.1(P1) U1.69(BT_UART_RXD)
BT_UART_TX: J5.3(P3) U1.70(BT_UART_TXD)
BT_USB_DM: R98.1 U1.96(BT_USB_DM)
BT_USB_DP: R99.1 U1.95(BT_USB_DP)
CTS_FTDI1: U7.11(I/O-VCC3) U8.18(ADBUS2)
CTS_FTDI2: U8.40(BDBUS2) U9.12(I/O-VCC2)
D2: J4.6 SW3.2(B) U1.110(ROW0/BUTTON/D2)
D3: J4.5 U1.109(LED3/D3)
D4: J4.4 U1.83(ROW2/DMIC_CLK/D4)
D5: J4.3 U1.84(ROW3/DMIC_DADTA/D5)
D6: J4.2 U1.85(ROW4/PCM_OUT/I2S_DO/D6)
D7: J4.1 U1.88(ROW5/PCM_IN/I2S_DI/D7)
D8: J3.10 U1.93(COL6/MCLK/D8)
D9: J3.9 U1.108(LED4/D9)
D10: J3.8 U1.81(COL7/SPI_CS/D10)
D11: J3.7 U1.89(ROW6/SPI_MOSI/D11)
D12: J3.6 U1.82(COL8/SPI_MISO/D12)
D13: J3.5 U1.90(ROW7/SPI_CLK/D13)
EECLK: R50.1 U8.62(EECLK) U10.2(SK)
EECS: R49.1 U8.63(EECS) U10.1(CS)
EEDATA: R51.1 R52.2 U8.61(EEDATA) U10.3(DI)
EXT_LPO: R12.2 U1.79(EXT_LPO)
LED1/SPI_WP: J1.1 SW4.1(A1) U1.117(LED1/SF_WP)
LED2/SPI_INT: J1.2 SW4.2(A2) U1.116(LED2/SPI_INT)
M_VDD: C6.1 MIC1.5(PWR) R11.C
MIC_BIAS: R10.1 U1.74(MIC_BIAS)
MIC_N: R15.1 U1.76(MICN)
MIC_P: R13.1 U1.75(MICP)
PUART_RX: J10.7(P7) R4.1 R103.1 U1.119(PUART_RXD/D0)
PUART_TX: J10.5(P5) R5.1 R102.1 U1.118(PUART_TXD/D1)
ROW1/ARD_RST: R72.B U1.111(ROW1/ARD_RST)
RSVD1: J2.1 U1.124(RSVD1)
RSVD2: J2.2 U1.123(RSVD2)
RSVD3: J2.3 U1.122(RSVD3)
RSVD4: J2.4 U1.121(RSVD4)
RSVD5: J2.5 U1.91(RSVD5)
RSVD6: J2.6 U1.86(RSVD6)
RSVD7: J2.7 U1.67(RSVD7)
RSVD8: J2.8 U1.66(RSVD8)
RSVD9: J2.9 U1.65(RSVD9)
RSVD10: J2.10 U1.64(RSVD10)
RTS_FTDI1: U7.10(I/O-VCC4) U8.19(ADBUS3)
RTS_FTDI2: U8.41(BDBUS3) U9.13(I/O-VCC1)
RXD_FTDI1: U7.13(I/O-VCC1) U8.16(ADBUS0)
RXD_FTDI2: U8.38(BDBUS0) U9.10(I/O-VCC4)
SCL: J3.1 R21.2 R28.2 R54.2 U1.112(SCL) U3.6(SCL)
SDA: J3.2 R25.2 R29.2 R53.2 U1.115(SDA) U3.2(SDA)
SDO_AG: R24.C U2.5(SDO_A/G)
SDO_M: R23.C U2.6(SDO_M)
STATUS: J1.5 U1.126(STATUS)
TX_CONF/SECI_IN: J1.7 U1.128(TX_CONF/BT_SECI_IN)
TX_REQ/SECI_OUT: J1.6 U1.127(TX_REQ/BT_SECI_OUT)
TXD_FTDI1: U7.12(I/O-VCC2) U8.17(ADBUS1)
TXD_FTDI2: U8.39(BDBUS1) U9.11(I/O-VCC3)
USB_DM: D9.2 J6.2(DM) U8.7(DM)
USB_DP: D8.2 J6.3(DP) U8.8(DP)
VCOIN: C13.1 J7.3(P3) J8.3(P3) J16.3(P3) TP17.1(TP) ZB1.P2
VPA_BT: C48.1 J16.4(P4) U1.97(VPA_BT)
N16840676: D7.C2(GREEN_CATHODE) R42.1
N16840680: D7.C1(RED_CATHODE) R43.1
N16840728: R44.1 U8.6(REF)
N16840732: R45.1 U8.14(R\E\S\E\T\)
N16840747: C44.1 U8.3(OSCO) Y1.1
N16840753: C45.1 U8.2(OSCI) Y1.3
N16840815: C36.2 C37.1 FB2.2 U8.9(VPLL)
N16840833: C34.2 C35.1 FB1.2 U8.4(VPHY)
N16840881: C38.2 C39.1 D10.2 FB3.2 J6.1(VBUS)
N16840895: FB3.1 R33.1 TH1.1
N16841244: R46.2 U8.54(BCBUS3)
N16841254: R47.2 U8.55(BCBUS4)
N16841256: D11.C2(GREEN_CATHODE) R46.1
N16841260: D11.C1(RED_CATHODE) R47.1
N16841280: R42.2 U8.29(ACBUS3)
N16841290: R43.2 U8.30(ACBUS4)
N16842485: R52.1 U10.4(DO)
N16906458: R41.2 U7.8(\\T\H\R\E\E\-\S\T\A\T\E)
N16909709: R48.2 U9.8(\\T\H\R\E\E\-\S\T\A\T\E)
N16940731: J5.2(P2) U7.2(I/O-VL1)
N16940734: J5.4(P4) U7.3(I/O-VL2)
N16940737: J5.6(P6) U7.4(I/O-VL3)
N16940740: J5.8(P8) U7.5(I/O-VL4)
N16940804: J10.2(P2) U9.2(I/O-VL1)
N16940807: J10.4(P4) U9.3(I/O-VL2)
N16940810: J10.6(P6) U9.4(I/O-VL3)
N16940813: J10.8(P8) U9.5(I/O-VL4)
N16943130: U4.2(LX1) U4.3(LX2) U4.10(L1)
N16943401: C15.2 R34.2 R37.1 U4.5(FB)
N16949318: D6.A(ANODE) R35.1
N16951339: C7.1 R13.2 R14.1
N16951341: R14.2 R15.2 R17.1
N16951488: C7.2 MIC1.1(OUT)
N16952185: C11.1 R20.2 R21.1 R25.1 R27.2 U3.8(VCC)
N16952193: R27.1 U3.7(RST)
N16961623: C2.1 R6.2 U1.77(MIC_AVDD)
N16966034: C8.2 C9.1 C10.1 R19.2 R22.1 R23.A R24.A R26.1 U2.1(VDD_IO1) U2.3(VDD_IO2) U2.22(VDD1) U2.23(VDD2)
N16967283: C5.1 R10.2 R11.B
N16973294: D1.C(CATHODE) R16.1
N16973296: D2.C(CATHODE) R18.1
N16973298: R16.2 SW4.4(B1)
N16973302: R18.2 SW4.3(B2)
N16973541: J14.2 R30.1 R32.2
N16975057: C1.1 J15.1 U1.100(VDDIO)
N16978114: L4.1 U5.5(LX)
N16978150: R97.2 U5.4(CE)
N16980600: D13.2 J9.2(DM) R98.2
N16980623: D14.2 J9.3(DP) R99.2
N16981586: D12.2 FB4.2 J9.1(VBUS)
N16981777: C47.1 D15.A FB4.1
N16982678: C28.1 G1.1(VIO) R101.1
N16982698: G1.7(OUT) R12.1
N16982700: C4.1 G1.12(VCC) R100.1
N16992027: J4.7 R102.2
N16992028: J4.8 R103.2
N16992597: J13.4(P4) R5.2
N16992601: J13.2(P2) R4.2
N169529011: R28.1 U2.2(SCL/SPC)
N169529012: R29.1 U2.4(SDA/SDI/SDO)
N169529013: TP3.1(TP) U2.9(DRDY_M)
N169529014: R26.2 U2.8(CS_M)
N169529016: TP1.1(TP) U2.11(INT1_A/G)
N1695290113: C12.2 U2.21(CAP)
N1695290115: R22.2 U2.7(CS_A/G)
N1695290117: TP2.1(TP) U2.12(INT2_A/G)
N1695290122: TP4.1(TP) U2.10(INT_M)
N1695290123: TP5.1(TP) U2.13(DEN_A/G)

Pads without a net: G1 2 3 4 5 8 9 10 11; J3 3; J6 4; J7 1 5; J8 1 5; J9 4; J11 1 8; J13 6 7 8 9; J16 1 5; SW1 2 3; SW2 2 3; SW3 1 4; U1 113; U2 24; U3 3 4 5; U4 1 4; U7 6 9; U8 21 22 23 24 26 27 28 32 33 34 36 43 44 45 46 48 52 53 57 58 59 60; U9 6 9; U10 6 7; ZB1 P1

## Via types
v1: diameter 0.5, hole 0.25, TOP to BOTTOM, 965 vias

## Routing (per net, layer and track width the routed paths; a pad name or vN(x,y) marks a point on that pad's centre or on a via; arc(x,y) is an arc through that point)
1V8_FTDI: length 45.4
  L03_PWR w0.508: v1(24.38,36.09) 24.37,36.09 23.7,35.43 21.62,35.43 ; 21.62,35.43 21.62,30.53 ; 21.62,35.43 19.08,37.97 13.69,37.97 12.85,38.81 v1(10.24,38.81) ; 21.62,30.53 v1(21.62,27.52) ; 21.62,30.53 16.27,30.53 v1(13.46,27.72)
  BOTTOM w0.279: U8.49 20.95,29.55 21.62,28.87 C40.1 ; C21.2 22.4,36.1 22.18,36.32 U8.37 ; C23.2 13.45,28.48 U8.64 ; U8.12 11.95,36.32 11.93,36.3 11.5,36.3 11.02,36.78 11.02,37.05 C22.2
  BOTTOM w0.381: C40.1 v1(21.62,27.52) ; v1(10.24,38.81) 10.25,38.8 10.25,38.21 10.76,37.7 C22.2 ; C21.2 24.38,36.1 v1(24.38,36.09) ; C23.2 v1(13.46,27.72)
GND: length 287.6
  TOP w0.254: v1(48.39,57) 48.37,57.02 C12.1 ; U3.1 62.8,51.42 v1(62.56,51.66) ; C9.2 46.55,58.13 46.56,58.14 ; C10.2 v1(46.55,55.79)
  TOP w0.279: G1.6 v1(81.12,50.29) ; C28.2 v1(80.54,51.92) ; C4.2 v1(85.61,51.7)
  TOP w0.381: R32.1 v1(27.71,6.76) ; D8.1 v1(6.75,36.46) ; C8.1 43.31,53.39 43.74,52.96 v1(44.04,52.96) ; C38.1 v1(7.42,40.08) ; D9.1 v1(6.75,39.13)
  TOP w0.457: v1(105.36,47.42) U1.HS5 v1(106.58,45.69) ; 15.06,3.07 14.3,3.84 J13.5 ; U1.107 v1(97.11,25.36) ; U1.HS6 84.7,46.33 v1(84.68,46.3) ; U1.87 v1(84.41,37.94) ; J13.3 13,3.84 13,3.83 12.31,3.13 ; U1.68 v1(99.11,47.45) ; U1.99 v1(89.11,25.46) ; v1(105.36,25.45) 105.35,25.46 U1.HS8 106.35,26.56 106.38,26.54 v1(106.42,26.54) ; SW1.1 v1(69.28,2.52) ; R24.B 43.99,50.93 v1(44.22,51.16) ; U1.125 v1(106.89,38.94) ; SW3.3 v1(98.09,6.34) ; C11.2 67.23,53.26 v1(66.9,53.59) ; U1.80 v1(87.11,47.53) ; v1(106.53,33.93) 106.52,33.94 U1.120 ; SW2.1 v1(72.52,6.47) ; U1.94 84.51,30.94 v1(84.51,30.94) ; R23.B v1(43.27,48.98) ; R2.2 v1(104.93,49.52)
  TOP w0.508: TP8.1 20.04,69.52 ; TP8.1 18.06,69.52 ; TP8.1 20.04,67.54 ; TP8.1 18.06,67.54 ; 2.63,15.23 J9.SH4 2.63,13.47 ; 21.39,9.81 TP6.1 ; TP6.1 23.37,9.81 ; TP6.1 21.39,7.82 ; TP6.1 23.37,7.82 ; 62.52,62.04 J3.4 ; J3.4 62.52,60.43 ; J3.4 64.13,62.04 ; J3.4 64.13,60.43 ; 3.55,59.59 TP7.1 ; TP7.1 5.54,59.59 ; TP7.1 3.55,57.61 ; TP7.1 5.54,57.61 ; 2.63,41.52 J6.SH3 2.63,39.76 ; TP18.1 10.14,13.77 ; TP18.1 8.15,11.78 ; TP18.1 8.15,13.77 ; TP18.1 10.14,11.78 ; J13.3 13.65,3.24 ; v1(84.66,27.58) 85.46,27.58 U1.HS7 85.36,26.7 v1(84.68,26.7) ; 68.38,67.22 J1.10 ; J1.10 70,67.22 ; J1.10 70,68.83 ; J1.10 68.38,68.83 ; J11.7 80.89,12.17 ; J11.7 79.28,12.17 ; J11.7 80.89,13.78 ; J11.7 79.28,13.78 ; 2.63,21.63 J9.SH3 2.63,19.87 ; 13.68,3.24 J13.5 ; J11.6 78.35,13.78 ; J11.6 76.74,13.78 ; J11.6 78.35,12.17 ; J11.6 76.74,12.17 ; 2.63,33.36 J6.SH4 2.63,35.12
  L02_GND w0.508: 68.38,67.22 J1.10 ; J1.10 68.38,68.83 ; J1.10 70,67.22 ; J1.10 70,68.83 ; J3.4 64.13,60.43 ; J3.4 62.52,62.04 ; J3.4 62.52,60.43 ; J3.4 64.13,62.04 ; 18.06,69.52 TP8.1 ; TP8.1 20.04,67.54 ; TP8.1 20.04,69.52 ; TP8.1 18.06,67.54 ; J13.3 13.65,3.24 ; TP7.1 5.54,59.59 ; TP7.1 3.55,57.61 ; TP7.1 5.54,57.61 ; TP7.1 3.55,59.59 ; J11.7 80.89,12.17 ; J11.7 79.28,13.78 ; J11.7 79.28,12.17 ; J11.7 80.89,13.78 ; 76.74,13.78 J11.6 ; J11.6 78.35,12.17 ; J11.6 78.35,13.78 ; J11.6 76.74,12.17 ; 8.15,13.77 TP18.1 ; TP18.1 10.14,11.78 ; TP18.1 10.14,13.77 ; TP18.1 8.15,11.78 ; 2.63,35.12 J6.SH4 2.63,33.36 ; 21.39,9.81 TP6.1 ; TP6.1 23.37,7.82 ; TP6.1 21.39,7.82 ; TP6.1 23.37,9.81 ; 2.63,13.47 J9.SH4 2.63,15.23 ; 2.63,41.52 J6.SH3 2.63,39.76 ; 2.63,19.87 J9.SH3 2.63,21.63 ; 13.68,3.24 J13.5
  L03_PWR w0.508: TP6.1 23.37,7.82 ; TP6.1 23.37,9.81 ; TP6.1 21.39,9.81 ; TP6.1 21.39,7.82 ; 18.06,69.52 TP8.1 ; TP8.1 20.04,67.54 ; TP8.1 18.06,67.54 ; TP8.1 20.04,69.52 ; 2.63,19.87 J9.SH3 2.63,21.63 ; 3.55,59.59 TP7.1 ; TP7.1 5.54,59.59 ; TP7.1 3.55,57.61 ; TP7.1 5.54,57.61 ; 76.74,13.78 J11.6 ; J11.6 78.35,12.17 ; J11.6 78.35,13.78 ; J11.6 76.74,12.17 ; 2.63,13.47 J9.SH4 2.63,15.23 ; TP18.1 10.14,11.78 ; TP18.1 8.15,11.78 ; TP18.1 10.14,13.77 ; TP18.1 8.15,13.77 ; J13.3 13.65,3.24 ; 2.63,41.52 J6.SH3 2.63,39.76 ; 62.52,60.43 J3.4 ; J3.4 64.13,62.04 ; J3.4 64.13,60.43 ; J3.4 62.52,62.04 ; 79.28,13.78 J11.7 ; J11.7 79.28,12.17 ; J11.7 80.89,12.17 ; J11.7 80.89,13.78 ; J1.10 70,67.22 ; J1.10 68.38,67.22 ; J1.10 70,68.83 ; J1.10 68.38,68.83 ; J6.SH4 2.63,35.12 ; 13.68,3.24 J13.5
  BOTTOM w0.279: U8.15 11.99,37.82 v1(11.66,38.15) ; U8.25 v1(17.45,39.88) ; U8.51 19.95,29.55 19.74,29.34 v1(19.74,29.31) ; U8.35 22.38,37.32 22.53,37.46 ; U8.11 11.69,35.82 v1(11.61,35.74) 11.98,35.37 12.22,35.37 12.27,35.32 U8.10 ; U8.13 v1(11.72,36.82) ; v1(12.09,30.33) 12.09,30.58 12.33,30.82 U8.1 ; U8.5 v1(11.83,32.82) ; v1(19.38,28.73) 19.77,28.34 C41.1 ; v1(21.08,40.21) 21.28,40.4 C31.1 ; U8.47 22.58,31.32 v1(22.76,31.5) ; v1(12.6,29.24) 12.61,29.23 C23.1 ; C30.1 15.79,39.91 v1(15.8,39.9) ; C29.1 v1(16.36,29.14)
  BOTTOM w0.381: v1(9.14,37.11) 9.35,37.31 C22.1 ; C34.1 C35.2 v1(8.68,32.3) ; C42.1 v1(22.47,12.86) ; C46.1 14.4,14.24 v1(14.4,13.51) ; v1(8.27,36.19) C37.2 C36.1 10.73,36.19 v1(10.77,36.14) ; C25.1 v1(14.66,49.33) ; 17.71,14.35 17.71,15.95 ; C43.1 22.47,22.36 v1(22.48,22.35) ; U10.5 v1(15.17,14.26) ; C33.2 v1(19.59,41.37)
  BOTTOM w0.457: C45.2 v1(11.13,29.44) ; C44.2 7.5,30.11 v1(7.65,30.25) ; R44.2 v1(7.88,34.02)
  BOTTOM w0.508: J1.10 70,68.83 ; J1.10 68.38,67.22 ; J1.10 68.38,68.83 ; J1.10 70,67.22 ; J11.6 78.35,12.17 ; J11.6 76.74,12.17 ; J11.6 78.35,13.78 ; J11.6 76.74,13.78 ; TP6.1 23.37,9.81 ; TP6.1 23.37,7.82 ; TP6.1 21.39,7.82 ; TP6.1 21.39,9.81 ; J13.3 13.65,3.24 ; 2.63,41.52 J6.SH3 2.63,39.76 ; 62.52,62.04 J3.4 ; J3.4 64.13,62.04 ; J3.4 64.13,60.43 ; J3.4 62.52,60.43 ; TP7.1 5.54,59.59 ; TP7.1 5.54,57.61 ; TP7.1 3.55,59.59 ; TP7.1 3.55,57.61 ; 2.63,35.12 J6.SH4 2.63,33.36 ; 8.15,11.78 TP18.1 ; TP18.1 10.14,11.78 ; TP18.1 10.14,13.77 ; TP18.1 8.15,13.77 ; 79.28,13.78 J11.7 ; J11.7 79.28,12.17 ; J11.7 80.89,12.17 ; J11.7 80.89,13.78 ; 2.63,15.23 J9.SH4 2.63,13.47 ; 2.63,19.87 J9.SH3 2.63,21.63 ; 18.06,69.52 TP8.1 ; TP8.1 18.06,67.54 ; TP8.1 20.04,67.54 ; TP8.1 20.04,69.52 ; 13.68,3.24 J13.5
  BOTTOM w0.762: C13.2 v1(49.34,57.01)
  vias: v1(0.76,32.77) v1(0.94,42.24) v1(1.27,45.59) v1(1.4,12.85) v1(1.45,4.9) v1(1.5,22.56) v1(1.47,2.03) v1(1.63,59.26) v1(1.83,49.2) v1(1.88,52.25) v1(1.96,42.09) v1(2.03,69.6) v1(2.11,46.66) v1(2.49,22.12) v1(2.74,33.93) v1(2.77,14.66) v1(2.74,13.89) v1(2.79,37.49) v1(2.82,19) v1(2.79,16.97) v1(2.82,15.88) v1(2.82,9.3) v1(2.9,36.09) v1(3.15,63.35) v1(3.07,54.61) v1(3.23,71.65) v1(3.4,42.14) v1(3.56,49.02) v1(3.86,27.97) v1(3.96,44.4) v1(4.01,32.79) v1(4.06,31.9) v1(4.09,2.77) v1(4.14,1.55) v1(4.24,12.73) v1(4.42,42.09) v1(5,11.25) v1(5.05,8.59) v1(5.08,42.65) v1(5.18,13.82) v1(5.36,15.95) v1(5.46,18.69) v1(5.46,17.04) v1(5.56,35.26) v1(5.54,28.07) v1(5.74,14.48) v1(5.87,34.37) v1(5.99,71.02) v1(6.2,55.19) v1(6.35,22.61) v1(6.63,5.82) v1(6.73,64.14) v1(7.09,66.24) v1(7.37,21.72) v1(7.37,1.83) v1(7.44,42.9) v1(7.54,36.88) v1(7.95,19.18) v1(8.03,38.53) v1(8.05,16.59) v1(8.22,26.4) v1(8.43,21.49) v1(8.59,15.11) v1(8.81,16.64) v1(8.92,38.51) v1(9.14,19.2) v1(9.78,39.85) v1(9.93,1.88) v1(10.26,21.21) v1(10.29,65.79) v1(10.36,18.59) v1(10.29,16.81) v1(10.42,28.1) v1(10.59,15.67) v1(10.64,14.2) v1(10.62,13.28) v1(10.67,10.03) v1(10.79,8.2) v1(11.23,18.08) v1(11.33,49.5) v1(11.96,14.22) v1(12.01,41.35) v1(12.04,16.97) v1(11.99,15.88) v1(12.01,13.26) v1(12.01,11.35) v1(12.27,21.21) v1(12.37,26.85) v1(12.47,42.57) v1(12.52,19.13) v1(12.57,60.35) v1(12.57,59.72) v1(12.57,1.98) v1(13.77,62.86) v1(14.15,8.18) v1(14.4,17.75) v1(14.48,6.83) v1(14.61,66.04) v1(14.73,62.61) v1(14.86,61.72) v1(14.78,44.65) v1(15.24,43.1) v1(15.54,1.02) v1(15.75,62.23) v1(15.75,61.09) v1(15.82,8.18) v1(15.88,1.88) v1(15.98,9.78) v1(16.13,65.66) v1(16.1,35.74) v1(16.15,33.35) v1(16.18,34.57) v1(16.33,6.83) v1(16.48,16.08) v1(17.2,35.81) v1(17.2,34.57) v1(17.2,33.32) v1(17.53,12.34) v1(17.55,8.18) v1(17.5,2.49) v1(17.63,18.59) v1(17.81,6.22) v1(18.14,33.27) v1(18.14,9.22) v1(18.21,35.76) v1(18.19,34.57) v1(18.36,63.4) v1(18.44,64.14) v1(18.49,60.66) v1(18.54,19.86) v1(18.52,1.52) v1(19.08,4.98) v1(19.23,66.29) v1(19.25,6.63) v1(19.43,45.59) v1(19.56,70.1) v1(19.71,61.09) v1(19.71,18.62) v1(19.94,48.64) v1(20.07,50.39) v1(20.12,9.4) v1(20.19,66.8) v1(20.24,63.78) v1(20.29,5.64) v1(20.32,3.71) v1(20.37,44.4) v1(20.52,8.18) v1(20.96,26.7) v1(21.36,61.85) v1(21.34,4.55) v1(21.41,60.5) v1(21.44,2.64) v1(21.49,18.08) v1(21.59,58.17) v1(21.95,49.25) v1(21.92,47.78) v1(22.12,41.1) v1(22.15,26.62) v1(22.23,61.82) v1(22.2,60.5) v1(22.3,6.22) v1(22.45,45.47) v1(22.4,42.16) v1(22.48,20.95) v1(22.63,3.25) v1(22.63,1.4) v1(22.73,36.91) v1(23.16,32.26) v1(23.24,58.04) v1(23.29,37.64) v1(23.44,55.73) v1(23.62,20.83) v1(23.62,18.03) v1(23.72,4.95) v1(23.72,2.41) v1(23.9,30.76) v1(23.88,21.97) v1(24.1,32) v1(24.21,1.04) v1(24.41,37.77) v1(24.51,12.22) v1(24.89,58.17) v1(24.94,38.89) v1(24.97,36.93) v1(25.22,2.31) v1(25.4,18.8) v1(25.4,8.2) v1(25.37,6.6) v1(25.78,41.83) v1(25.78,14.48) v1(25.91,1.07) v1(26.01,3.56) v1(26.42,19.56) v1(26.92,12.95) v1(27.05,2.31) v1(27.18,29.08) v1(27.43,26.54) v1(27.56,18.29) v1(27.61,33.17) v1(27.81,15.37) v1(28.19,25.27) v1(28.58,61.21) v1(28.58,55.24) v1(28.58,11.56) v1(28.7,62.74) v1(28.7,58.29) v1(28.7,53.72) v1(28.7,14.22) v1(29.08,19.3) v1(29.21,28.7) v1(29.34,59.05) v1(29.34,15.75) v1(29.46,27.43) v1(29.46,13.03) v1(29.57,32.38) v1(29.59,45.47) v1(29.72,42.93) v1(29.84,41.91) v1(30.35,9.27) v1(30.91,66.37) v1(31.24,50.93) v1(31.37,69.34) v1(31.39,67.79) v1(31.5,42.42) v1(31.55,30.23) v1(31.75,52.96) v1(32,3.68) v1(32.56,32.36) v1(32.56,30.18) v1(32.64,42.29) v1(32.92,66.47) v1(33.32,67.87) v1(33.27,52.83) v1(34.04,42.42) v1(34.42,9.65) v1(34.67,69.22) v1(34.8,18.03) v1(34.92,66.04) v1(34.95,3.38) v1(35.05,62.23) v1(35.05,6.48) v1(35.18,25.65) v1(35.31,49.28) v1(35.28,2.31) v1(35.43,16.38) v1(35.56,46.48) v1(35.81,50.93) v1(35.84,12.78) v1(35.94,22.73) v1(35.94,1.04) v1(36.12,57.12) v1(36.32,67.74) v1(36.32,60.45) v1(36.32,36.58) v1(36.53,42.34) v1(36.58,39.5) v1(36.58,33.66) v1(36.83,11.43) v1(37.08,65.41) v1(37.21,54.58) v1(37.31,52.35) v1(37.44,49.45) v1(37.47,45.34) v1(37.39,2.31) v1(37.74,35.74) v1(37.72,20.95) v1(37.9,3.63) v1(38.15,58.45) v1(38.18,31.09) v1(38.61,1.07) v1(38.73,9.78) v1(38.99,45.34) v1(39.09,55.65) v1(39.12,51.79) v1(39.37,65.66) v1(39.47,53.95) v1(39.52,42.29) v1(39.57,2.34) v1(39.67,17.91) v1(39.85,26.44) v1(40.13,6.73) v1(40.23,59.08) v1(40.21,40.97) v1(40.23,1.04) v1(40.56,70.03) v1(40.54,28.52) v1(40.59,55.91) v1(40.77,35.05) v1(41.02,65.18) v1(41.15,43.69) v1(41.12,14.43) v1(41.25,2.31) v1(41.3,61.32) v1(41.45,58.17) v1(41.76,1.04) v1(41.91,36.14) v1(42.42,6.99) v1(42.72,69.88) v1(42.85,33.38) v1(42.93,41.78) v1(43.15,1.04) v1(43.26,26.19) v1(43.43,2.34) v1(43.54,28.52) v1(43.76,70.1) v1(43.84,55.12) v1(44.22,60.81) v1(44.63,2.36) v1(44.63,1.04) v1(44.83,5.21) v1(45.11,55.52) v1(45.26,39.5) v1(45.21,8.76) v1(45.54,22.56) v1(45.64,59.74) v1(45.62,41.78) v1(45.59,3.68) v1(45.69,35.56) v1(45.9,18.41) v1(45.87,12.83) v1(45.87,1.07) v1(46.58,65.91) v1(46.61,2.54) v1(46.79,60.88) v1(47.19,61.87) v1(47.37,6.48) v1(47.52,69.65) v1(47.47,57.96) v1(47.5,3.94) v1(47.78,44.98) v1(47.78,1.04) v1(47.88,8.25) v1(48.39,59.03) v1(48.56,35.71) v1(48.62,2.41) v1(48.74,22.17) v1(48.72,19.23) v1(48.77,3.68) v1(48.89,13) v1(49.1,44.09) v1(49.66,62.2) v1(49.73,66.07) v1(49.68,1.07) v1(50.39,2.41) v1(50.93,62.08) v1(50.93,7.37) v1(51.31,43.97) v1(51.36,1.04) v1(51.77,45.9) v1(51.79,8.92) v1(52.12,66.24) v1(52.2,2.41) v1(52.3,57.89) v1(52.4,69.47) v1(52.83,1.04) v1(53.04,43.18) v1(53.26,62.74) v1(53.21,21.64) v1(53.72,19.13) v1(53.85,35.13) v1(54,47.24) v1(54.05,2.41) v1(54.41,59.23) v1(54.51,55.93) v1(54.56,51.87) v1(54.53,13.23) v1(54.56,1.07) v1(54.84,4.11) v1(55.02,5.66) v1(55.12,6.99) v1(55.42,9.02) v1(55.5,69.77) v1(55.63,63.09) v1(55.6,57.99) v1(55.88,51.38) v1(55.96,2.36) v1(56.06,49.66) v1(56.24,46.51) v1(56.29,41.27) v1(56.41,1.04) v1(56.77,5.46) v1(57.07,62.99) v1(57.15,53.14) v1(57.1,22.38) v1(57.3,18.77) v1(57.3,3.71) v1(57.38,56.26) v1(57.63,59.26) v1(57.76,66.98) v1(57.71,58.09) v1(57.79,26.31) v1(57.91,6.99) v1(58.04,12.83) v1(57.99,1.04) v1(58.19,8.92) v1(58.37,2.41) v1(58.42,5.49) v1(58.5,35.28) v1(58.57,48.67) v1(58.88,72.24) v1(59.11,62.94) v1(59.11,55.37) v1(59.44,1.04) v1(59.49,69.47) v1(59.77,43.33) v1(59.87,57.2) v1(59.92,27.79) v1(59.92,19.23) v1(60.4,66.98) v1(60.38,9.04) v1(60.55,13.46) v1(60.93,55.45) v1(60.93,1.04) v1(60.99,40.89) v1(61.09,62.97) v1(61.44,31.14) v1(61.72,44.91) v1(61.85,69.55) v1(62.05,35.41) v1(62.23,58.37) v1(62.66,22.28) v1(62.76,55.42) v1(62.71,18.19) v1(62.81,1.04) v1(63.07,5.89) v1(63.14,2.41) v1(63.32,57.76) v1(63.27,9.02) v1(63.75,66.5) v1(64.06,62.99) v1(64.11,42.57) v1(64.39,59.08) v1(64.57,26.11) v1(64.64,2.41) v1(64.85,72.31) v1(64.8,6.43) v1(65.05,55.47) v1(65,1.04) v1(65.61,57.2) v1(66.17,58.65) v1(66.09,45.24) v1(66.19,25.83) v1(66.45,22.12) v1(66.45,1.04) v1(66.55,62.99) v1(66.52,8.99) v1(66.75,55.42) v1(67.21,57.43) v1(67.61,33.17) v1(67.89,1.04) v1(68.43,8.97) v1(68.5,55.22) v1(68.48,18.72) v1(69.01,43.99) v1(69.14,38.48) v1(69.34,1.04) v1(69.47,72.42) v1(69.52,58.85) v1(69.49,53.92) v1(69.57,21.95) v1(69.75,50.24) v1(69.9,27.41) v1(70.13,9.04) v1(70.28,35.56) v1(70.54,53.26) v1(70.51,46.08) v1(70.48,20.35) v1(70.51,2.44) v1(70.82,1.04) v1(70.97,29.24) v1(71.22,68.17) v1(71.17,66.85) v1(71.48,59.26) v1(71.53,56.67) v1(71.65,52.37) v1(71.6,9.07) v1(71.83,27.03) v1(72.26,1.04) v1(72.29,2.44) v1(72.42,34.16) v1(72.72,46.56) v1(72.82,22.91) v1(73.13,57.58) v1(73.23,55.12) v1(73.25,18.31) v1(73.36,9.04) v1(73.51,51.13) v1(73.71,1.04) v1(73.99,72.49) v1(74.02,59.54) v1(74.17,29.62) v1(74.35,22.96) v1(74.37,38.48) v1(74.55,19.71) v1(74.68,56.01) v1(74.93,26.49) v1(75.03,41.76) v1(75.16,1.04) v1(75.21,17.22) v1(75.34,52.81) v1(75.46,15.06) v1(75.79,57.58) v1(76.2,59.39) v1(76.43,9.35) v1(76.56,1.07) v1(76.94,2.41) v1(77.19,5.74) v1(77.34,16.94) v1(77.5,22.66) v1(77.57,18.67) v1(78,72.47) v1(78,42.67) v1(78.05,2.51) v1(78.13,58.27) v1(78.1,0.89) v1(78.23,26.8) v1(78.44,10.87) v1(78.56,59.51) v1(78.61,6.32) v1(79.02,22.73) v1(79.25,15.85) v1(79.35,0.91) v1(79.53,29.67) v1(79.83,37.39) v1(79.91,40.69) v1(79.88,39.19) v1(79.98,18.54) v1(80.04,9.8) v1(80.14,34.06) v1(80.39,26.8) v1(80.54,50.98) v1(80.8,16.87) v1(80.92,4.01) v1(81.31,0.86) v1(81.46,58.62) v1(81.79,63.04) v1(81.79,15.06) v1(81.89,18.82) v1(82.25,72.47) v1(82.25,28.45) v1(82.35,59.39) v1(82.4,22.91) v1(82.52,0.97) v1(82.6,25.93) v1(82.68,57.48) v1(82.83,49.58) v1(83.06,47.45) v1(83.24,27.86) v1(83.77,29.72) v1(83.74,25.53) v1(83.72,0.94) v1(83.82,23.19) v1(83.87,13.92) v1(83.95,3.33) v1(84.05,63.04) v1(84.25,22.3) v1(84.25,18.97) v1(84.2,17.4) v1(84.25,16.1) v1(84.23,9.14) v1(84.23,8.2) v1(84.25,6.63) v1(84.2,4.27) v1(84.53,34.47) v1(84.61,59.44) v1(84.61,44.88) v1(84.66,40.46) v1(84.63,36.45) v1(84.66,35.46) v1(84.73,43.43) v1(84.68,42.44) v1(84.68,41.45) v1(84.89,55.37) v1(84.96,47.5) v1(85.14,2.44) v1(85.45,56.9) v1(85.55,10.16) v1(85.55,8.51) v1(85.55,5.38) v1(85.57,63.07) v1(85.57,19.25) v1(85.62,17.75) v1(85.6,4.01) v1(85.72,22.35) v1(85.88,72.21) v1(86.06,23.32) v1(87.27,66.57) v1(87.35,23.62) v1(87.3,18.9) v1(87.5,62.97) v1(87.76,30.15) v1(87.83,28.45) v1(87.96,44.35) v1(87.99,58.42) v1(88.01,16.26) v1(88.16,56.54) v1(88.14,42.19) v1(88.34,38.28) v1(88.34,33.99) v1(88.52,29.39) v1(88.87,22.61) v1(88.9,9.83) v1(89.03,40.31) v1(88.98,8.53) v1(89.08,66.6) v1(89.15,23.62) v1(89.13,15.9) v1(89.2,21.01) v1(89.56,62.79) v1(89.89,72.26) v1(90.02,58.22) v1(90.12,42.72) v1(90.09,16.97) v1(90.35,51.94) v1(90.4,4.45) v1(90.63,15.24) v1(90.68,18.8) v1(90.86,53.8) v1(90.78,35.2) v1(90.93,22.99) v1(91.01,55.73) v1(91.08,66.75) v1(91.16,40.72) v1(91.08,38.43) v1(91.31,21.34) v1(91.31,16.51) v1(91.44,51.97) v1(91.64,24.23) v1(91.74,9.63) v1(91.92,63.42) v1(91.92,44.22) v1(91.92,30.18) v1(92.2,28.63) v1(92.33,57.76) v1(92.53,14.61) v1(92.48,2.39) v1(92.66,42.29) v1(92.61,25.32) v1(92.61,19.74) v1(92.63,16.23) v1(92.81,33.22) v1(92.96,56.44) v1(92.96,4.47) v1(93.22,7.37) v1(93.34,28.47) v1(93.5,59.46) v1(93.6,25.37) v1(93.6,21.44) v1(93.6,18.29) v1(93.57,16.08) v1(93.8,39.34) v1(94.03,62.33) v1(94.03,53.98) v1(94.06,51.94) v1(94.06,36.17) v1(93.98,9.8) v1(94.08,72.21) v1(94.16,43.48) v1(94.31,30.51) v1(94.64,25.4) v1(94.64,19.69) v1(94.59,16.56) v1(94.95,14.71) v1(95.61,25.43) v1(95.66,21.54) v1(95.66,18.9) v1(95.76,33.76) v1(95.96,30.4) v1(96.09,9.73) v1(96.49,15.32) v1(96.6,63.5) v1(96.57,58.93) v1(96.7,36.27) v1(96.75,28.4) v1(96.88,4.5) v1(97.31,20.88) v1(97.69,34.06) v1(97.71,10.36) v1(97.79,41.2) v1(97.87,18.41) v1(97.99,48.59) v1(98.07,29.03) v1(98.53,43.26) v1(98.58,64.34) v1(98.58,44.35) v1(98.83,2.84) v1(99.16,72.19) v1(99.16,39.7) v1(99.09,38.33) v1(99.21,16.28) v1(99.39,4.7) v1(99.59,63.3) v1(99.62,34.11) v1(99.62,31.47) v1(99.75,20.07) v1(99.69,7.98) v1(100.08,10.69) v1(100.53,14.78) v1(100.48,5.66) v1(100.48,0.81) v1(100.84,33.71) v1(101.09,38.48) v1(101.14,36.58) v1(101.19,22.17) v1(101.45,42.65) v1(101.65,32.21) v1(101.6,29.64) v1(101.75,19.28) v1(101.78,17.91) v1(102.06,50.34) v1(102.06,43.71) v1(102.36,41) v1(102.62,1.35) v1(102.84,41.94) v1(103.15,34.26) v1(103.2,15.85) v1(103.3,24.41) v1(103.43,44.3) v1(103.38,13.41) v1(103.38,10.46) v1(103.45,8.2) v1(103.5,5.66) v1(103.58,19.25) v1(103.81,0.91) v1(103.96,60.2) v1(104.01,35.33) v1(104.14,61.57) v1(104.11,42.52) v1(104.09,30.53) v1(104.11,29.03) v1(104.19,40.08) v1(104.5,68.68) v1(105.16,3.28) v1(105.23,48.34) v1(105.31,66.42) v1(105.28,5.99) v1(105.87,70.51) v1(105.84,22.2) v1(105.87,18.44) v1(106.1,3.28) v1(106.35,59.94) v1(106.65,27.84) v1(107.06,14) v1(107.19,65.96) v1(107.57,63.96) v1(107.67,68.63) v1(107.8,17.68) v1(107.92,23.49) v1(107.98,19.58) v1(108.05,15.8) v1(108,12.67) v1(108.25,10.06) v1(108.18,2.39) v1(108.33,35) v1(108.36,28.02) v1(108.33,24.69) v1(108.56,37.06) v1(108.51,31.5) v1(108.51,5.69) v1(108.61,38.43)
GND_A: length 3.1
  TOP w0.508: U1.78 v1(89.11,47.41) 88.34,48.18 88.34,48.98 C2.2
  vias: v1(89.59,50.93) v1(90.96,50.93) v1(91.08,48.23) v1(91.24,49.1) v1(92.28,50.93) v1(94.01,48.51) v1(94.06,47.52) v1(94.36,51.08) v1(99.95,51.97) v1(100.41,55.93) v1(100.43,52.96) v1(101.24,54.23) v1(102.16,53.59) v1(102.13,51.59) v1(102.34,58.6) v1(103.35,58.57) v1(103.78,51.59) v1(104.7,58.5) v1(105.59,51.59) v1(105.77,54.51) v1(106.1,58.78) v1(107.11,58.57) v1(107.16,54.51) v1(107.19,57.68)
VBATT: length 195.9
  TOP w0.508: J1.8 66.1,70.02 98.74,70.02 108.66,60.1 108.66,51.05 107.98,50.37 103.1,50.37 102.92,50.19 R1.2 ; 87.71,22.43 88.13,22.85 C3.1 88.11,24.53 U1.98
  TOP w1.016: 65.94,38.02 65.94,28.22 72.77,21.39 86.66,21.39 87.71,22.43 ; 65.94,38.02 41,38.02 37.87,41.15 30.48,41.15 29.24,39.9 29.24,38.14 J8.4 ; 65.94,38.02 76.33,48.41 76.33,53.59 80.31,57.58 80.31,62.2 78.82,63.7 68.43,63.7 J1.8
VDD1P8: length 54.3
  TOP w0.254: U5.3 13.57,61.16 12.88,61.84 C20.1
  TOP w0.508: TP13.1 12.88,65.35 C20.1
  BOTTOM w1.016: 11.15,60.38 11.15,58.83 15.6,54.38 25.77,54.38 J7.6 28.63,47.11 28.63,41.29 J8.6 28.65,36.9 28.65,31.03 J16.6
  vias: v1(10.73,61.92) v1(11.43,61.93) v1(12.14,61.93)
VDD3P3: length 326.2
  TOP w0.254: v1(87.99,54.1) 87.91,54.18 R100.2
  TOP w0.381: D11.A1 v1(2.35,25.92) ; D11.A2 v1(2.35,26.92) ; D7.A1 v1(2.28,29.22) ; v1(2.29,30.23) 2.29,30.22 D7.A2
  TOP w0.508: C16.1 22.54,65.67 22.37,65.5 R34.1 C15.1 ; TP12.1 27.43,67.54 ; TP12.1 27.43,69.52 ; TP12.1 25.45,69.52 ; TP12.1 25.45,67.54 ; v1(16.71,43.12) 15.51,44.32 v1(15.51,49.37)
  TOP w1.016: 30.84,31.29 J8.2 ; 30.82,44.22 J7.2
  TOP w1.27: J11.4 72.47,14.96 71.71,15.71 45.93,15.71 36.75,24.89 36.75,29.54 35,31.29 27.66,31.29 26.41,32.54 26.41,39.11 27.53,40.23 27.53,42.75 29.01,44.22 30.82,44.22
  L03_PWR w0.508: TP12.1 27.43,69.52 ; TP12.1 25.45,69.52 ; TP12.1 27.43,67.54 ; TP12.1 25.45,67.54 ; v1(11.89,39.98) 13.55,39.98 v1(14.94,41.37) 14.95,41.37 v1(16.71,43.12) v1(20.44,43.12) 26.26,43.12 26.7,43.56 ; v1(2.29,30.23) 2.29,29.23 v1(2.28,29.22) 2.35,29.14 v1(2.35,26.92) v1(2.35,25.92) 3.95,24.32 5.18,24.32 ; v1(20.29,27.18) 20.29,25.27 20.69,24.88 v1(20.69,23.22) ; v1(7.22,34.55) 7.22,33.74 6.55,33.07 6.55,31.17 v1(6.93,30.78) 6.93,24.37 6.98,24.32 ; 25.73,33.32 v1(24.21,33.32) ; v1(11.23,21.29) 11.23,22.2 12.17,23.14 12.17,25.04 v1(12.73,25.6) v1(13.84,25.6) 14.12,25.6 v1(15.11,26.59) ; v1(87.99,54.1) 71.2,54.1 69.01,56.29 58.42,56.29 51.54,63.17 42.39,63.17 41.48,64.08 26.7,64.08 ; v1(16.92,27.64) 16.92,25.37 16.46,24.92
  L03_PWR w1.27: J16.2 26.88,23.77 25.73,24.92 ; 26.87,35.28 27.05,35.46 27.05,43.21 26.7,43.56 26.7,65.91 ; 26.87,35.28 28.17,35.28 29.45,34 J8.2 ; 26.87,35.28 25.73,34.14 25.73,24.92 ; 25.73,24.92 16.46,24.92 14.43,22.89 9.63,22.89 8.2,24.31 7,24.31 6.98,24.32 5.18,24.32
  BOTTOM w0.279: C29.2 17.45,28.68 U8.56 ; U8.31 20.45,40.88 C31.2 20.43,42.13 C33.1 ; C32.2 23.23,33.82 U8.42 ; C30.2 14.95,40.56 U8.20 ; U8.50 20.45,29.31 20.62,29.14 C41.2
  BOTTOM w0.381: v1(11.89,39.98) 11.88,39.97 R45.2 ; U9.14 21.61,23.2 C43.2 v1(20.69,23.22) ; FB2.1 v1(7.22,34.55) ; R49.2 v1(12.73,25.6) ; R51.2 v1(15.11,26.59) ; v1(6.93,30.78) 6.96,30.78 7.42,31.25 FB1.1 ; C46.2 13.21,14.59 13.21,15.92 U10.8 13.22,17.18 11.2,19.2 11.2,21.26 v1(11.23,21.29) ; v1(15.51,49.37) C25.2 16.31,50.06 16.97,50.73 U7.14 ; R50.2 v1(13.84,25.6) ; C29.2 17.21,27.93 v1(16.92,27.64) ; C33.1 v1(20.44,43.12) ; C30.2 v1(14.94,41.37) ; v1(20.29,27.18) 20.62,27.5 C41.2
  BOTTOM w0.508: v1(24.21,33.32) 23.71,33.83 C32.2
  vias: v1(22.53,67.74) v1(23.37,67.74) v1(23.39,66.93) v1(24.23,67.74) v1(24.28,66.88)
VDD5V: length 126.4
  TOP w0.254: 19.46,62.39 C17.1
  TOP w0.381: 16.59,59.39 16.59,63.4 17.91,64.72 20.35,64.72 20.86,64.2 U4.6
  TOP w0.508: 18.52,58.06 18.85,58.39 18.85,59.99 19.17,60.32 C18.1
  TOP w0.635: C17.1 18.48,62.49 17.7,61.72 17.7,58.47
  TOP w1.016: 13.74,53.47 5.77,53.47 TP14.1
  TOP w1.27: 19.46,55.7 20.83,55.7 24.33,52.2 24.33,40.94 21.31,37.92 21.31,30.43 24.33,27.41 24.33,24.36 27.43,21.26 34.92,21.26 37.52,18.67 37.52,14.43 41.27,10.67 73.91,10.67 75.01,11.76 J11.5
VDDIO: length 384.8
  TOP w0.254: v1(77.98,52.2) 78.25,51.92 R101.2
  TOP w0.381: R54.1 v1(101.9,21.95) ; R53.1 v1(103.07,21.95) ; R11.A v1(100.54,55.16) ; R30.2 v1(28.93,6.71) ; R20.1 v1(68.35,53.54) ; R19.1 v1(42.67,57.12)
  TOP w0.457: v1(107.18,5.89) 107.02,5.74 D1.A ; v1(107.18,3.34) 107,3.16 D2.A
  TOP w0.508: R6.1 v1(90.09,50.01)
  L02_GND w0.762: v1(42.67,57.12) 37.77,57.12 35.66,55.02 35.66,53.47 34.09,51.89 29.67,51.89 28.42,50.65 28.42,47.68 29.32,46.78 J7.4
  L03_PWR w0.381: 29.76,8.09 29.76,7.53 v1(28.93,6.71)
  L03_PWR w0.457: 38.53,8.06 38.56,8.09
  L03_PWR w0.508: 16.79,17.65 16.85,17.71 v1(16.85,22.54) ; v1(20.65,12.09) 20.65,13.08 22.68,15.11 22.73,15.11 ; 12.55,47.19 19.94,47.19 v1(20.85,48.11) ; v1(101.9,21.95) v1(103.07,21.95) 104.85,21.95 105,21.79
  L03_PWR w0.762: 77.06,31.75 77.06,23.93 67.39,14.25 J11.2 67.39,11.71 66.27,10.59 51.51,10.59 49.53,8.61 J15.2 46.56,5.13 43.6,8.09 29.76,8.09 20.19,17.65 16.03,17.65 13.56,20.12 7.52,20.12 ; 77.06,31.75 77.06,44.83 75.54,46.35 ; 77.06,31.75 77.17,31.85 97.18,31.85 105,24.03 105,13.31 107.18,11.14 v1(107.18,5.89) v1(107.18,3.34) ; J13.1 10.08,3.86 8.69,5.26 8.69,9.25 6.73,11.2 6.73,19.33 7.52,20.12 ; 77.8,48.62 87.05,48.62 88.44,50.01 ; 77.8,48.62 75.54,46.35 ; 77.8,48.62 77.8,52.02 v1(77.98,52.2) ; 75.54,46.35 68.35,53.54 v1(68.35,53.54) 67.39,54.51 57.89,54.51 51.54,60.86 48.34,60.86 44.65,57.18 44.65,57.12 v1(42.67,57.12) ; 88.44,50.01 88.44,51.77 89.53,52.86 96.39,52.86 98.69,55.16 v1(100.54,55.16) ; 88.44,50.01 v1(90.09,50.01) ; 7.52,20.12 7.42,20.12 5.31,22.23 4.14,22.23 1.4,24.97 1.4,31.37 3.94,33.91 3.94,38.35 6.58,41 9.17,41 12.55,44.37 12.55,55.55 9.45,58.65 9.45,63.09 10.09,63.74 16.12,63.74 v1(17.27,62.59)
  BOTTOM w0.381: v1(20.65,12.09) 20.7,12.04 C42.2 21.61,12.05 21.61,14.35 ; v1(17.27,62.59) 17.61,62.25 C24.2 16.97,60.76 U7.1
  BOTTOM w0.457: R48.1 v1(16.85,22.54)
  BOTTOM w0.508: v1(20.85,48.11) R41.1
